# EAGLE board Sequence Detector 1101 (EAGLE 9.7.0)

Size 299.08 x 52.4 mm. Coordinates in mm from the lower left corner, seen from the top.
Outline: 0,0 299.08,0 299.08,52.4 0,52.4 0,0
Copper layers (1*16): Top 0.035mm / dielectric 1.5mm / Bottom 0.035mm
Design rules "default": minimum track width 6mil, minimum drill 0.35mm, track to track 6mil, track to pad 6mil, pad to pad 6mil, via to via 6mil, smd to smd 6mil, copper to edge 40mil, drill to drill 6mil, minimum pad ring 10mil, minimum via ring 8mil, stop-mask expansion 4mil, vias tented up to drill 0mil, thermal gap 10mil

## Footprints (pad centres in the part's own frame; a part is rotated, then mirrored left to right if it is on the bottom)
BATTERY-GENERIC = drill 1.118 pad 3.15 octagon: + 2.54,0; - -2.54,0
DIP762W53P254L1969H508Q14B = drill 0.743 pad 1.343: 1 -3.81,7.62; 2 -3.81,5.08; 3 -3.81,2.54; 4 -3.81,0; 5 -3.81,-2.54; 6 -3.81,-5.08; 7 -3.81,-7.62; 8 3.81,-7.62; 9 3.81,-5.08; 10 3.81,-2.54; 11 3.81,0; 12 3.81,2.54; 13 3.81,5.08; 14 3.81,7.62

## Placement (x,y rotation side)
FUNC1  FUNCTION-GENERATOR  [BATTERY-GENERIC]  8.26,8.26 180 top
P1  BATTERYGENERIC  [BATTERY-GENERIC]  18.49,44.15 180 top
U1  74HC74_PDIP  [DIP762W53P254L1969H508Q14B]  103.98,33.44 90 top
U2  74HC32_PDIP  [DIP762W53P254L1969H508Q14B]  70.96,33.44 90 top
U6  74HC04_PDIP  [DIP762W53P254L1969H508Q14B]  159.69,33.84 90 top
U7  74HC08_PDIP  [DIP762W53P254L1969H508Q14B]  185.09,33.84 90 top
U8  74HC11_PDIP  [DIP762W53P254L1969H508Q14B]  210.49,33.84 90 top
U9  74HC32_PDIP  [DIP762W53P254L1969H508Q14B]  238.43,33.84 90 top
U10  74HC74_PDIP  [DIP762W53P254L1969H508Q14B]  261.29,33.84 90 top
U11  74HC11_PDIP  [DIP762W53P254L1969H508Q14B]  284.15,33.84 90 top

## Library data of the parts
FUNC1 P1 U1 U2 U6-U11 = Tinkercad

## Nets
FUNC1+: FUNC1.+ U1.3 U1.11 U10.3 U10.11
FUNC1-: FUNC1.- P1.- U1.7 U2.7 U6.7 U7.7 U8.7 U9.7 U10.7 U11.7
P1+: P1.+ U1.1 U1.4 U1.10 U1.13 U1.14 U2.14 U6.14 U7.14 U8.5 U8.14 U9.14 U10.1 U10.4 U10.10 U10.13 U10.14 U11.14
U1_1!Q: U1.6 U2.5
U1_2!Q: U1.8 U2.4
U1_D1: U1.2 U2.6
U1_D2: U1.5 U1.12 U6.1 U8.2 U8.11 U11.13
U6_1Y: U6.2 U8.3
U7_1Y: U7.3 U9.1
U8_1Y: U8.12 U9.2
U8_2Y: U8.6 U9.4
U8_3Y: U8.8 U9.5
U9_1Y: U9.3 U10.2
U10_1Q: U7.1 U8.1 U8.4 U10.5 U11.1
U10_2!Q: U7.2 U8.10 U10.6 U10.8
U10_2Q: U8.13 U10.9 U11.2
U10_D2: U9.6 U10.12

## Tracks (layer width: path | path; a pad name or v marks a point on that pad's centre or on a via)
FUNC1+  (4 unrouted)
FUNC1-  (9 unrouted)
P1+  (17 unrouted)
U1_1!Q  (1 unrouted)
U1_2!Q  (1 unrouted)
U1_D1  (1 unrouted)
U1_D2  (5 unrouted)
U6_1Y  (1 unrouted)
U7_1Y  (1 unrouted)
U8_1Y  (1 unrouted)
U8_2Y  (1 unrouted)
U8_3Y  (1 unrouted)
U9_1Y  (1 unrouted)
U10_1Q  (4 unrouted)
U10_2!Q  (3 unrouted)
U10_2Q  (2 unrouted)
U10_D2  (1 unrouted)